# EAGLE board CT_schematic (EAGLE 7.6.0)

Size 100 x 80 mm. Coordinates in mm from the lower left corner, seen from the top.
Outline: 0,0 100,0 100,80 0,80 0,0
Copper layers (1*16): Top 0.035mm / dielectric 1.5mm / Bottom 0.035mm
Design rules "default": minimum track width 10mil, minimum drill 24mil, track to track 8mil, track to pad 8mil, pad to pad 8mil, via to via 8mil, smd to smd 8mil, copper to edge 40mil, drill to drill 8mil, minimum pad ring 10mil, minimum via ring 8mil, stop-mask expansion 4mil, vias tented up to drill 0mil, thermal gap 10mil

## Footprints (pad centres in the part's own frame; a part is rotated, then mirrored left to right if it is on the bottom)
C0402 = smd 0.5 x 0.5: 1 -0.508,0; 2 0.508,0
C0603 = smd 0.8 x 0.8: 1 -0.762,0; 2 0.762,0
C0805 = smd 1.2 x 1.3: 1 -1.016,0; 2 1.016,0
C1210 = smd 1.2 x 2.5: 1 -1.524,0; 2 1.524,0
C1206 = smd 1.3 x 1.6: 1 -1.524,0; 2 1.524,0
R0603 = smd 0.8 x 0.8: 1 -0.762,0; 2 0.762,0
2220 = smd 1.85 x 5.5: 1 -2.55,0; 2 2.55,0
EXV-9H = smd 3.505 x 1.676: 1 -2.857,0; 2 2.857,0
L1210 = smd 1.2 x 2.5: 1 -1.524,0; 2 1.524,0
IND25X25CZ = smd 2.489 x 3.429: 1 -2.718,0; 2 2.718,0
DR1040 = smd 1.6 x 3.2: 1 -4.458,0; 2 4.458,0
PJ-037B_PACKAGE = drill 3.7 square: 1 12,0 | drill 3.2 square: 2 6,0
R0402 = smd 0.5 x 0.5: 1 -0.508,0; 2 0.508,0
BGA624N80P25X25_210X210X20 = smd 0.5 x 0.5: A2 -8.8,9.6; A3 -8,9.6; A4 -7.2,9.6; A5 -6.4,9.6; A6 -5.6,9.6; A7 -4.8,9.6; A8 -4,9.6; A9 -3.2,9.6; A10 -2.4,9.6; A11 -1.6,9.6; A12 -0.8,9.6; A13 0,9.6; A14 0.8,9.6; A15 1.6,9.6; A16 2.4,9.6; A17 3.2,9.6; A18 4,9.6; A19 4.8,9.6; A20 5.6,9.6; A21 6.4,9.6; A22 7.2,9.6; A23 8,9.6; A24 8.8,9.6; A25 9.6,9.6; AA1 -9.6,-6.4; AA2 -8.8,-6.4; AA3 -8,-6.4; AA4 -7.2,-6.4; AA5 -6.4,-6.4; AA6 -5.6,-6.4; AA7 -4.8,-6.4; AA8 -4,-6.4; AA9 -3.2,-6.4; AA10 -2.4,-6.4; AA11 -1.6,-6.4; AA12 -0.8,-6.4; AA13 0,-6.4; AA14 0.8,-6.4; AA15 1.6,-6.4; AA16 2.4,-6.4; AA17 3.2,-6.4; AA18 4,-6.4; AA19 4.8,-6.4; AA20 5.6,-6.4; AA21 6.4,-6.4; AA22 7.2,-6.4; AA23 8,-6.4; AA24 8.8,-6.4; AA25 9.6,-6.4; AB1 -9.6,-7.2; AB2 -8.8,-7.2; AB3 -8,-7.2; AB4 -7.2,-7.2; AB5 -6.4,-7.2; AB6 -5.6,-7.2; AB7 -4.8,-7.2; AB8 -4,-7.2; AB9 -3.2,-7.2; AB10 -2.4,-7.2; AB11 -1.6,-7.2; AB12 -0.8,-7.2; AB13 0,-7.2; AB14 0.8,-7.2; AB15 1.6,-7.2; AB16 2.4,-7.2; AB17 3.2,-7.2; AB18 4,-7.2; AB19 4.8,-7.2; AB20 5.6,-7.2; AB21 6.4,-7.2; AB22 7.2,-7.2; AB23 8,-7.2; AB24 8.8,-7.2; AB25 9.6,-7.2; AC1 -9.6,-8; AC2 -8.8,-8; AC3 -8,-8; AC4 -7.2,-8; AC5 -6.4,-8; AC6 -5.6,-8; AC7 -4.8,-8; AC8 -4,-8; AC9 -3.2,-8; AC10 -2.4,-8; AC11 -1.6,-8; AC12 -0.8,-8; AC13 0,-8; AC14 0.8,-8; AC15 1.6,-8; AC16 2.4,-8; AC17 3.2,-8; AC18 4,-8; AC19 4.8,-8; AC20 5.6,-8; AC21 6.4,-8; AC22 7.2,-8; AC23 8,-8; AC24 8.8,-8; AC25 9.6,-8; AD1 -9.6,-8.8; AD2 -8.8,-8.8; AD3 -8,-8.8; AD4 -7.2,-8.8; AD5 -6.4,-8.8; AD6 -5.6,-8.8; AD7 -4.8,-8.8; AD8 -4,-8.8; AD9 -3.2,-8.8; AD10 -2.4,-8.8; AD11 -1.6,-8.8; AD12 -0.8,-8.8; AD13 0,-8.8; AD14 0.8,-8.8; AD15 1.6,-8.8; AD16 2.4,-8.8; AD17 3.2,-8.8; AD18 4,-8.8; AD19 4.8,-8.8; AD20 5.6,-8.8; AD21 6.4,-8.8; AD22 7.2,-8.8; AD23 8,-8.8; AD24 8.8,-8.8; AD25 9.6,-8.8; AE1 -9.6,-9.6; AE2 -8.8,-9.6; AE3 -8,-9.6; AE4 -7.2,-9.6; AE5 -6.4,-9.6; AE6 -5.6,-9.6; AE7 -4.8,-9.6; AE8 -4,-9.6; AE9 -3.2,-9.6; AE10 -2.4,-9.6; AE11 -1.6,-9.6; AE12 -0.8,-9.6; AE13 0,-9.6; AE14 0.8,-9.6; AE15 1.6,-9.6; AE16 2.4,-9.6; AE17 3.2,-9.6; AE18 4,-9.6; AE19 4.8,-9.6; AE20 5.6,-9.6; AE21 6.4,-9.6; AE22 7.2,-9.6; AE23 8,-9.6; AE24 8.8,-9.6; AE25 9.6,-9.6; B1 -9.6,8.8; B2 -8.8,8.8; B3 -8,8.8; B4 -7.2,8.8; B5 -6.4,8.8; B6 -5.6,8.8; B7 -4.8,8.8; B8 -4,8.8; B9 -3.2,8.8; B10 -2.4,8.8; B11 -1.6,8.8; B12 -0.8,8.8; B13 0,8.8; B14 0.8,8.8; B15 1.6,8.8; B16 2.4,8.8; B17 3.2,8.8; B18 4,8.8; B19 4.8,8.8; B20 5.6,8.8; B21 6.4,8.8; B22 7.2,8.8; B23 8,8.8; B24 8.8,8.8; B25 9.6,8.8; C1 -9.6,8; C2 -8.8,8; C3 -8,8; C4 -7.2,8; C5 -6.4,8; C6 -5.6,8; C7 -4.8,8; C8 -4,8; C9 -3.2,8; C10 -2.4,8; C11 -1.6,8; C12 -0.8,8; C13 0,8; C14 0.8,8; C15 1.6,8; C16 2.4,8; C17 3.2,8; C18 4,8; C19 4.8,8; C20 5.6,8; C21 6.4,8; C22 7.2,8; C23 8,8; C24 8.8,8; C25 9.6,8; D1 -9.6,7.2; D2 -8.8,7.2; D3 -8,7.2; D4 -7.2,7.2; D5 -6.4,7.2; D6 -5.6,7.2; D7 -4.8,7.2; D8 -4,7.2; D9 -3.2,7.2; D10 -2.4,7.2; D11 -1.6,7.2; D12 -0.8,7.2; D13 0,7.2; D14 0.8,7.2; D15 1.6,7.2; D16 2.4,7.2; D17 3.2,7.2; D18 4,7.2; D19 4.8,7.2; D20 5.6,7.2; D21 6.4,7.2; D22 7.2,7.2; D23 8,7.2; D24 8.8,7.2; D25 9.6,7.2; E1 -9.6,6.4; E2 -8.8,6.4; E3 -8,6.4; E4 -7.2,6.4; E5 -6.4,6.4; E6 -5.6,6.4; E7 -4.8,6.4; E8 -4,6.4; E9 -3.2,6.4; E10 -2.4,6.4; E11 -1.6,6.4; E12 -0.8,6.4; E13 0,6.4; E14 0.8,6.4; E15 1.6,6.4; E16 2.4,6.4; E17 3.2,6.4; E18 4,6.4; E19 4.8,6.4; E20 5.6,6.4; E21 6.4,6.4; E22 7.2,6.4; E23 8,6.4; E24 8.8,6.4; E25 9.6,6.4; F1 -9.6,5.6; F2 -8.8,5.6; F3 -8,5.6; F4 -7.2,5.6; F5 -6.4,5.6; F6 -5.6,5.6; F7 -4.8,5.6; F8 -4,5.6; F9 -3.2,5.6; F10 -2.4,5.6; F11 -1.6,5.6; F12 -0.8,5.6; F13 0,5.6; F14 0.8,5.6; F15 1.6,5.6; F16 2.4,5.6; F17 3.2,5.6; F18 4,5.6; F19 4.8,5.6; F20 5.6,5.6; F21 6.4,5.6; F22 7.2,5.6; F23 8,5.6; F24 8.8,5.6; F25 9.6,5.6; G1 -9.6,4.8; G2 -8.8,4.8; G3 -8,4.8; G4 -7.2,4.8; G5 -6.4,4.8; G6 -5.6,4.8; G7 -4.8,4.8; G8 -4,4.8; G9 -3.2,4.8; G10 -2.4,4.8; G11 -1.6,4.8; G12 -0.8,4.8; G13 0,4.8; G14 0.8,4.8; G15 1.6,4.8; G16 2.4,4.8; G17 3.2,4.8; G18 4,4.8; G19 4.8,4.8; G20 5.6,4.8; G21 6.4,4.8; G22 7.2,4.8; G23 8,4.8; G24 8.8,4.8; G25 9.6,4.8; H1 -9.6,4; H2 -8.8,4; H3 -8,4; H4 -7.2,4; H5 -6.4,4; H6 -5.6,4; H7 -4.8,4; H8 -4,4; H9 -3.2,4; H10 -2.4,4; H11 -1.6,4; H12 -0.8,4; H13 0,4; H14 0.8,4; H15 1.6,4; H16 2.4,4; H17 3.2,4; H18 4,4; H19 4.8,4; H20 5.6,4; H21 6.4,4; H22 7.2,4; H23 8,4; H24 8.8,4; H25 9.6,4; J1 -9.6,3.2; J2 -8.8,3.2; J3 -8,3.2; J4 -7.2,3.2; J5 -6.4,3.2; J6 -5.6,3.2; J7 -4.8,3.2; J8 -4,3.2; J9 -3.2,3.2; J10 -2.4,3.2; J11 -1.6,3.2; J12 -0.8,3.2; J13 0,3.2; J14 0.8,3.2; J15 1.6,3.2; J16 2.4,3.2; J17 3.2,3.2; J18 4,3.2; J19 4.8,3.2; J20 5.6,3.2; J21 6.4,3.2; J22 7.2,3.2; J23 8,3.2; J24 8.8,3.2; J25 9.6,3.2; K1 -9.6,2.4; K2 -8.8,2.4; K3 -8,2.4; K4 -7.2,2.4; K5 -6.4,2.4; K6 -5.6,2.4; K7 -4.8,2.4; K8 -4,2.4; K9 -3.2,2.4; K10 -2.4,2.4; K11 -1.6,2.4; K12 -0.8,2.4; K13 0,2.4; K14 0.8,2.4; K15 1.6,2.4; K16 2.4,2.4; K17 3.2,2.4; K18 4,2.4; K19 4.8,2.4; K20 5.6,2.4; K21 6.4,2.4; K22 7.2,2.4; K23 8,2.4; K24 8.8,2.4; K25 9.6,2.4; L1 -9.6,1.6; L2 -8.8,1.6; L3 -8,1.6; L4 -7.2,1.6; L5 -6.4,1.6; L6 -5.6,1.6; L7 -4.8,1.6; L8 -4,1.6; L9 -3.2,1.6; L10 -2.4,1.6; L11 -1.6,1.6; L12 -0.8,1.6; L13 0,1.6; L14 0.8,1.6; L15 1.6,1.6; L16 2.4,1.6; L17 3.2,1.6; L18 4,1.6; L19 4.8,1.6; L20 5.6,1.6; L21 6.4,1.6; L22 7.2,1.6; L23 8,1.6; L24 8.8,1.6; L25 9.6,1.6; M1 -9.6,0.8; M2 -8.8,0.8; M3 -8,0.8; M4 -7.2,0.8; M5 -6.4,0.8; M6 -5.6,0.8; M7 -4.8,0.8; M8 -4,0.8; M9 -3.2,0.8; M10 -2.4,0.8; M11 -1.6,0.8; M12 -0.8,0.8; M13 0,0.8; M14 0.8,0.8; M15 1.6,0.8; M16 2.4,0.8; M17 3.2,0.8; M18 4,0.8; M19 4.8,0.8; M20 5.6,0.8; M21 6.4,0.8; M22 7.2,0.8; M23 8,0.8; M24 8.8,0.8; M25 9.6,0.8; N1 -9.6,0; N2 -8.8,0; N3 -8,0; N4 -7.2,0; N5 -6.4,0; N6 -5.6,0; N7 -4.8,0; N8 -4,0; N9 -3.2,0; N10 -2.4,0; N11 -1.6,0; N12 -0.8,0; N13 0,0; N14 0.8,0; N15 1.6,0; N16 2.4,0; N17 3.2,0; N18 4,0; N19 4.8,0; N20 5.6,0; N21 6.4,0; N22 7.2,0; N23 8,0; N24 8.8,0; N25 9.6,0; P1 -9.6,-0.8; P2 -8.8,-0.8; P3 -8,-0.8; P4 -7.2,-0.8; P5 -6.4,-0.8; P6 -5.6,-0.8; P7 -4.8,-0.8; P8 -4,-0.8; P9 -3.2,-0.8; P10 -2.4,-0.8; P11 -1.6,-0.8; P12 -0.8,-0.8; P13 0,-0.8; P14 0.8,-0.8; P15 1.6,-0.8; P16 2.4,-0.8; P17 3.2,-0.8; P18 4,-0.8; P19 4.8,-0.8; P20 5.6,-0.8; P21 6.4,-0.8; P22 7.2,-0.8; P23 8,-0.8; P24 8.8,-0.8; P25 9.6,-0.8; R1 -9.6,-1.6; R2 -8.8,-1.6; R3 -8,-1.6; R4 -7.2,-1.6; R5 -6.4,-1.6; R6 -5.6,-1.6; R7 -4.8,-1.6; R8 -4,-1.6; R9 -3.2,-1.6; R10 -2.4,-1.6; R11 -1.6,-1.6; R12 -0.8,-1.6; R13 0,-1.6; R14 0.8,-1.6; R15 1.6,-1.6; R16 2.4,-1.6; R17 3.2,-1.6; R18 4,-1.6; R19 4.8,-1.6; R20 5.6,-1.6; R21 6.4,-1.6; R22 7.2,-1.6; R23 8,-1.6; R24 8.8,-1.6; R25 9.6,-1.6; T1 -9.6,-2.4; T2 -8.8,-2.4; T3 -8,-2.4; T4 -7.2,-2.4; T5 -6.4,-2.4; T6 -5.6,-2.4; T7 -4.8,-2.4; T8 -4,-2.4; T9 -3.2,-2.4; T10 -2.4,-2.4; T11 -1.6,-2.4; T12 -0.8,-2.4; T13 0,-2.4; T14 0.8,-2.4; T15 1.6,-2.4; T16 2.4,-2.4; T17 3.2,-2.4; T18 4,-2.4; T19 4.8,-2.4; T20 5.6,-2.4; T21 6.4,-2.4; T22 7.2,-2.4; T23 8,-2.4; T24 8.8,-2.4; T25 9.6,-2.4; U1 -9.6,-3.2; U2 -8.8,-3.2; U3 -8,-3.2; U4 -7.2,-3.2; U5 -6.4,-3.2; U6 -5.6,-3.2; U7 -4.8,-3.2; U8 -4,-3.2; U9 -3.2,-3.2; U10 -2.4,-3.2; U11 -1.6,-3.2; U12 -0.8,-3.2; U13 0,-3.2; U14 0.8,-3.2; U15 1.6,-3.2; U16 2.4,-3.2; U17 3.2,-3.2; U18 4,-3.2; U19 4.8,-3.2; U20 5.6,-3.2; U21 6.4,-3.2; U22 7.2,-3.2; U23 8,-3.2; U24 8.8,-3.2; U25 9.6,-3.2; V1 -9.6,-4; V2 -8.8,-4; V3 -8,-4; V4 -7.2,-4; V5 -6.4,-4; V6 -5.6,-4; V7 -4.8,-4; V8 -4,-4; V9 -3.2,-4; V10 -2.4,-4; V11 -1.6,-4; V12 -0.8,-4; V13 0,-4; V14 0.8,-4; V15 1.6,-4; V16 2.4,-4; V17 3.2,-4; V18 4,-4; V19 4.8,-4; V20 5.6,-4; V21 6.4,-4; V22 7.2,-4; V23 8,-4; V24 8.8,-4; V25 9.6,-4; W1 -9.6,-4.8; W2 -8.8,-4.8; W3 -8,-4.8; W4 -7.2,-4.8; W5 -6.4,-4.8; W6 -5.6,-4.8; W7 -4.8,-4.8; W8 -4,-4.8; W9 -3.2,-4.8; W10 -2.4,-4.8; W11 -1.6,-4.8; W12 -0.8,-4.8; W13 0,-4.8; W14 0.8,-4.8; W15 1.6,-4.8; W16 2.4,-4.8; W17 3.2,-4.8; W18 4,-4.8; W19 4.8,-4.8; W20 5.6,-4.8; W21 6.4,-4.8; W22 7.2,-4.8; W23 8,-4.8; W24 8.8,-4.8; W25 9.6,-4.8; Y1 -9.6,-5.6; Y2 -8.8,-5.6; Y3 -8,-5.6; Y4 -7.2,-5.6; Y5 -6.4,-5.6; Y6 -5.6,-5.6; Y7 -4.8,-5.6; Y8 -4,-5.6; Y9 -3.2,-5.6; Y10 -2.4,-5.6; Y11 -1.6,-5.6; Y12 -0.8,-5.6; Y13 0,-5.6; Y14 0.8,-5.6; Y15 1.6,-5.6; Y16 2.4,-5.6; Y17 3.2,-5.6; Y18 4,-5.6; Y19 4.8,-5.6; Y20 5.6,-5.6; Y21 6.4,-5.6; Y22 7.2,-5.6; Y23 8,-5.6; Y24 8.8,-5.6; Y25 9.6,-5.6
NC7SZ125M5X = smd 1.3 x 0.7: 1 -1.3,0.95; 2 -1.3,0; 3 -1.3,-0.95; 4 1.3,-0.95; 5 1.3,0.95
ARDUCAM = drill 1 pad 1.8 square: 1 0,0 | drill 1 pad 1.8: 2 0,2.54; 3 2.54,0; 4 2.54,2.54; 5 5.08,0; 6 5.08,2.54; 7 7.62,0; 8 7.62,2.54; 9 10.16,0; 10 10.16,2.54; 11 12.7,0; 12 12.7,2.54; 13 15.24,0; 14 15.24,2.54; 15 17.78,0; 16 17.78,2.54; 17 20.32,0; 18 20.32,2.54; 19 22.86,0; 20 22.86,2.54
10100565 = smd 0.8 x 2.35: 1 0,0; 2 1.25,0; 3 2.55,0; 4 4.25,0; 5 5.43,0; 6 6.68,0; 7 7.93,0; 8 9.18,0; 9 11.67,0; 10 14.18,0; 11 15.43,0; 12 16.68,0; 13 17.93,0; 14 19.18,0; 15 21.68,0 | smd 1.5 x 3.1: 16 23.495,-1.375; 20 25.685,-22.875 | smd 1.55 x 3.1: 17 -1.815,-1.375; 21 -1.815,-22.875 | drill 1.1 pad 1.1: 18 21.68,-2.375; 19 0.68,-2.375
ER-TFT018-2 = smd 0.35 x 4: 1 0,0; 2 0.5,0; 3 1,0; 4 1.5,0; 5 2,0; 6 2.5,0; 7 3,0; 8 3.5,0; 9 4,0; 10 4.5,0; 11 5,0; 12 5.5,0; 13 6,0; 14 6.5,0; 15 7,0; 16 7.5,0; 17 8,0; 18 8.5,0; 19 9,0; 20 9.5,0; 21 10,0; 22 10.5,0; 23 11,0; 24 11.5,0; 25 12,0; 26 12.5,0; 27 13,0; 28 13.5,0; 29 14,0; 30 14.5,0; 31 15,0; 32 15.5,0; 33 16,0; 34 16.5,0; 35 17,0; 36 17.5,0; 37 18,0; 38 18.5,0; 39 19,0; 40 19.5,0
LH430WV2-SD01 = smd 0.23 x 0.7: 1 0,0; 2 -0.4,0; 3 -0.8,0; 4 -1.2,0; 5 -1.6,0; 6 -2,0; 7 -2.4,0; 8 -2.8,0; 9 -3.2,0; 10 -3.6,0; 11 -4,0; 12 -4.4,0; 13 -4.8,0; 14 -5.2,0; 15 -5.6,0; 16 -5.6,-2.15; 17 -5.2,-2.15; 18 -4.8,-2.15; 19 -4.4,-2.15; 20 -4,-2.15; 21 -3.6,-2.15; 22 -3.2,-2.15; 23 -2.8,-2.15; 24 -2.4,-2.15; 25 -2,-2.15; 26 -1.6,-2.15; 27 -1.2,-2.15; 28 -0.8,-2.15; 29 -0.4,-2.15; 30 0,-2.15
LBGA-64 = smd 0.559 x 0.559: A1 -3.5,3.5; A2 -2.5,3.5; A3 -1.5,3.5; A4 -0.5,3.5; A5 0.5,3.5; A6 1.5,3.5; A7 2.5,3.5; A8 3.5,3.5; B1 -3.5,2.5; B2 -2.5,2.5; B3 -1.5,2.5; B4 -0.5,2.5; B5 0.5,2.5; B6 1.5,2.5; B7 2.5,2.5; B8 3.5,2.5; C1 -3.5,1.5; C2 -2.5,1.5; C3 -1.5,1.5; C4 -0.5,1.5; C5 0.5,1.5; C6 1.5,1.5; C7 2.5,1.5; C8 3.5,1.5; D1 -3.5,0.5; D2 -2.5,0.5; D3 -1.5,0.5; D4 -0.5,0.5; D5 0.5,0.5; D6 1.5,0.5; D7 2.5,0.5; D8 3.5,0.5; E1 -3.5,-0.5; E2 -2.5,-0.5; E3 -1.5,-0.5; E4 -0.5,-0.5; E5 0.5,-0.5; E6 1.5,-0.5; E7 2.5,-0.5; E8 3.5,-0.5; F1 -3.5,-1.5; F2 -2.5,-1.5; F3 -1.5,-1.5; F4 -0.5,-1.5; F5 0.5,-1.5; F6 1.5,-1.5; F7 2.5,-1.5; F8 3.5,-1.5; G1 -3.5,-2.5; G2 -2.5,-2.5; G3 -1.5,-2.5; G4 -0.5,-2.5; G5 0.5,-2.5; G6 1.5,-2.5; G7 2.5,-2.5; G8 3.5,-2.5; H1 -3.5,-3.5; H2 -2.5,-3.5; H3 -1.5,-3.5; H4 -0.5,-3.5; H5 0.5,-3.5; H6 1.5,-3.5; H7 2.5,-3.5; H8 3.5,-3.5
QFN-28 = smd 0.813 x 0.305: 1 -2.451,1.5; 2 -2.451,1; 3 -2.451,0.5; 4 -2.451,0; 5 -2.451,-0.5; 6 -2.451,-1; 7 -2.451,-1.5; 15 2.451,-1.5; 16 2.451,-1; 17 2.451,-0.5; 18 2.451,0; 19 2.451,0.5; 20 2.451,1; 21 2.451,1.5 | smd 0.305 x 0.813: 8 -1.5,-2.451; 9 -1,-2.451; 10 -0.5,-2.451; 11 0,-2.451; 12 0.5,-2.451; 13 1,-2.451; 14 1.5,-2.451; 22 1.5,2.451; 23 1,2.451; 24 0.5,2.451; 25 0,2.451; 26 -0.5,2.451; 27 -1,2.451; 28 -1.5,2.451 | smd 3.607 x 3.607: 29 0,0
SJ-43515TS-SMT-TR = smd 2.2 x 3: 1 0.6,-7.4; 4 3.4,-7.4 | smd 3 x 3: 2 12.8,-7.4; 5 17,-3 | smd 2 x 3: 3 5.3,0; 6 2.5,0 | drill 1.8: P$7 4.5,-3.69; P$8 11.54,-3.69
ABLS-24.000MHZ-B4-T = smd 5.6 x 2.8: 1 -3.81,0; 2 5.69,0
ABS07-32.768KHZ-7-T = smd 1.1 x 2.4: 1 -2.5,0; 2 0,0
ABLS-12.288MHZ-B4-T = smd 5.6 x 2.8: 1 -3.81,0; 2 5.69,0
ASFL1 = smd 1.7 x 1.5: 1 -1.27,-1.1; 2 1.27,-1.1; 3 1.27,1.1; 4 -1.27,1.1
SHPCIE100 = smd 1.8 x 2.3: 1 0,0; 2 2.54,0; 3 5.08,0; 4 5.08,4.2; 5 2.54,4.2; 6 0,4.2
SOIC-8_EP = smd 1.6 x 0.533: 1 -2.921,1.905; 2 -2.921,0.635; 3 -2.921,-0.635; 4 -2.921,-1.905; 5 2.921,-1.905; 6 2.921,-0.635; 7 2.921,0.635; 8 2.921,1.905 | smd 2.54 x 3.302: EPAD 0,0 | drill 0.406 pad 0.406: P$1 -0.508,0.635; P$2 0.381,0.635; P$3 -0.508,-0.635; P$4 0.381,-0.635
WSON-8 = smd 0.3 x 0.6: 1 -0.75,0; 2 0.05,0; 3 0.85,0; 4 1.65,0; 5 1.65,3.8; 6 0.85,3.8; 7 0.05,3.8; 8 -0.75,3.8 | smd 3 x 2.6: PAD 0.45,1.9
DFN-8_DDB = smd 0.805 x 0.3: 1 -0.952,0.75; 2 -0.952,0.25; 3 -0.952,-0.25; 4 -0.952,-0.75; 5 0.952,-0.75; 6 0.952,-0.25; 7 0.952,0.25; 8 0.952,0.75 | smd 0.61 x 2.2: 9 0,0
IR3899MTR1PBF = smd 0.25 x 0.75: 1 0,0; 2 0.5,0; 3 1,0; 4 1.5,0; 5 2,0; 6 2.5,0; 7 3,0 | smd 0.75 x 0.25: 8 3.425,0.78; 9 3.425,1.28; 10 3.425,1.78; 14 -0.425,1.78; 15 -0.425,1.28; 16 -0.425,0.78 | smd 0.3 x 1.95: 11 3.22,3.63 | smd 1.62 x 2.42: 12 1.786,3.8 | smd 1 x 1.95: 13 0.117,3.63 | smd 2.19 x 1.25: 17 1.51,1.26
QFN-16_EP = smd 0.805 x 0.3: 1 -1.452,0.75; 2 -1.452,0.25; 3 -1.452,-0.25; 4 -1.452,-0.75; 9 1.452,-0.75; 10 1.452,-0.25; 11 1.452,0.25; 12 1.452,0.75 | smd 0.3 x 0.805: 5 -0.75,-1.452; 6 -0.25,-1.452; 7 0.25,-1.452; 8 0.75,-1.452; 13 0.75,1.452; 14 0.25,1.452; 15 -0.25,1.452; 16 -0.75,1.452 | smd 1.55 x 1.55: 17 0,0
QFN-38_UHF = smd 0.75 x 0.3: 1 -2.4,2.75; 2 -2.4,2.25; 3 -2.4,1.75; 4 -2.4,1.25; 6 -2.4,0.25; 7 -2.4,-0.25; 8 -2.4,-0.75; 9 -2.4,-1.25; 10 -2.4,-1.75; 11 -2.4,-2.25; 12 -2.4,-2.75; 20 2.4,-2.75; 21 2.4,-2.25; 22 2.4,-1.75; 23 2.4,-1.25; 24 2.4,-0.75; 25 2.4,-0.25; 26 2.4,0.25; 27 2.4,0.75; 28 2.4,1.25; 29 2.4,1.75; 30 2.4,2.25; 31 2.4,2.75 | smd 0.758 x 0.3: 5 -2.4,0.75 | smd 0.3 x 0.75: 13 -1.5,-3.4; 14 -1,-3.4; 15 -0.5,-3.4; 16 0,-3.4; 17 0.5,-3.4; 18 1,-3.4; 19 1.5,-3.4; 32 1.5,3.4; 33 1,3.4; 34 0.5,3.4; 35 0,3.4; 36 -0.5,3.4; 37 -1,3.4; 38 -1.5,3.4 | smd 3.2 x 5.2: 39 0,0
IRF8306MTRPBF = smd 0.9 x 1.85: 1 0,0; 2 0,-2.35; 6 6.4,0; 7 6.4,-2.35 | smd 0.75 x 0.75: 3 1.75,-1.175 | smd 1.45 x 0.87: 4 3.5,-0.565; 5 3.5,-1.785
SW_4-1437565-2 = smd 1.4 x 2.1: 1 -2.23,4.55; 2 -2.23,-4.55; 3 2.23,4.55; 4 2.23,-4.55
LGM67K-G1J2-24-Z = smd 0.8 x 1.4: A -2,0; C 0,0

## Placement (x,y rotation side)
C1  1.2e-11  [C0402]  -100.33,166.37 0 top  (outside the outline)
C2  1.2e-11  [C0402]  -104.14,166.37 0 top  (outside the outline)
C3  1.2e-11  [C0402]  -107.95,166.37 0 top  (outside the outline)
C4  1.2e-11  [C0402]  -111.76,166.37 0 top  (outside the outline)
C5  2.2e-07  [C0603]  -110.49,146.05 0 top  (outside the outline)
C6  1e-05  [C0805]  -34.29,130.81 0 top  (outside the outline)
C7  2.2e-07  [C0603]  -114.3,146.05 0 top  (outside the outline)
C8  2.2e-07  [C0603]  -118.11,146.05 0 top  (outside the outline)
C9  2.2e-07  [C0603]  -121.92,146.05 0 top  (outside the outline)
C10  2.2e-07  [C0603]  -125.73,146.05 0 top  (outside the outline)
C11  2.2e-07  [C0603]  -129.54,146.05 0 top  (outside the outline)
C12  2.2e-07  [C0603]  -133.35,146.05 0 top  (outside the outline)
C13  2.2e-07  [C0603]  -15.24,151.13 0 top  (outside the outline)
C14  2.2e-05  [C1210]  -38.1,118.11 0 top  (outside the outline)
C15  2.2e-07  [C0603]  -19.05,151.13 0 top  (outside the outline)
C16  2.2e-07  [C0603]  -22.86,151.13 0 top  (outside the outline)
C17  2.2e-07  [C0603]  -26.67,151.13 0 top  (outside the outline)
C18  1e-05  [C0805]  -39.37,130.81 0 top  (outside the outline)
C19  2.2e-07  [C0603]  -30.48,151.13 0 top  (outside the outline)
C20  2.2e-05  [C1210]  -44.45,118.11 0 top  (outside the outline)
C21  2.2e-07  [C0603]  -34.29,151.13 0 top  (outside the outline)
C22  2.2e-07  [C0603]  -38.1,151.13 0 top  (outside the outline)
C23  2.2e-07  [C0603]  -41.91,151.13 0 top  (outside the outline)
C24  2.2e-07  [C0603]  -45.72,151.13 0 top  (outside the outline)
C25  1e-05  [C0805]  -44.45,130.81 0 top  (outside the outline)
C26  1e-05  [C0805]  -49.53,130.81 0 top  (outside the outline)
C27  2.2e-07  [C0603]  -49.53,151.13 0 top  (outside the outline)
C28  2.2e-07  [C0603]  -53.34,151.13 0 top  (outside the outline)
C29  2.2e-07  [C0603]  -57.15,151.13 0 top  (outside the outline)
C30  1e-05  [C0805]  -54.61,130.81 0 top  (outside the outline)
C31  2.2e-07  [C0603]  -60.96,151.13 0 top  (outside the outline)
C32  1e-05  [C0805]  -59.69,130.81 0 top  (outside the outline)
C33  1e-05  [C0805]  -64.77,130.81 0 top  (outside the outline)
C34  1e-05  [C0805]  -69.85,130.81 0 top  (outside the outline)
C35  2.2e-07  [C0603]  -64.77,151.13 0 top  (outside the outline)
C36  1e-05  [C0805]  -74.93,130.81 0 top  (outside the outline)
C37  2.2e-07  [C0603]  -68.58,151.13 0 top  (outside the outline)
C38  4.7e-06  [C0805]  -80.01,130.81 0 top  (outside the outline)
C39  2.2e-07  [C0603]  -72.39,151.13 0 top  (outside the outline)
C40  4.7e-06  [C0805]  -85.09,130.81 0 top  (outside the outline)
C41  2.2e-07  [C0603]  -76.2,151.13 0 top  (outside the outline)
C42  4.7e-06  [C0805]  -90.17,130.81 0 top  (outside the outline)
C43  2.2e-07  [C0603]  -80.01,151.13 0 top  (outside the outline)
C44  4.7e-06  [C0805]  -95.25,130.81 0 top  (outside the outline)
C45  2.2e-07  [C0603]  -83.82,151.13 0 top  (outside the outline)
C46  4.7e-06  [C0805]  -100.33,130.81 0 top  (outside the outline)
C47  2.2e-07  [C0603]  -87.63,151.13 0 top  (outside the outline)
C48  4.7e-06  [C0805]  -105.41,130.81 0 top  (outside the outline)
C49  2.2e-07  [C0603]  -91.44,151.13 0 top  (outside the outline)
C50  4.7e-06  [C0805]  -110.49,130.81 0 top  (outside the outline)
C51  2.2e-07  [C0603]  -95.25,151.13 0 top  (outside the outline)
C52  4.7e-06  [C0805]  -115.57,130.81 0 top  (outside the outline)
C53  2.2e-07  [C0603]  -99.06,151.13 0 top  (outside the outline)
C54  1e-05  [C0805]  -120.65,130.81 0 top  (outside the outline)
C55  1e-07  [C0402]  -133.35,171.45 0 top  (outside the outline)
C56  2.2e-07  [C0603]  -102.87,151.13 0 top  (outside the outline)
C57  2.2e-07  [C0603]  -106.68,151.13 0 top  (outside the outline)
C58  2.2e-07  [C0603]  -110.49,151.13 0 top  (outside the outline)
C59  2.2e-07  [C0603]  -114.3,151.13 0 top  (outside the outline)
C60  2.2e-07  [C0603]  -118.11,151.13 0 top  (outside the outline)
C61  2.2e-07  [C0603]  -121.92,151.13 0 top  (outside the outline)
C62  2.2e-07  [C0603]  -125.73,151.13 0 top  (outside the outline)
C63  2.2e-07  [C0603]  -129.54,151.13 0 top  (outside the outline)
C64  1e-05  [C0805]  -125.73,130.81 0 top  (outside the outline)
C65  2.2e-07  [C0603]  -133.35,151.13 0 top  (outside the outline)
C66  2.2e-07  [C0603]  -15.24,156.21 0 top  (outside the outline)
C67  2.2e-07  [C0603]  -19.05,156.21 0 top  (outside the outline)
C68  2.2e-07  [C0603]  -22.86,156.21 0 top  (outside the outline)
C69  2.2e-07  [C0603]  -26.67,156.21 0 top  (outside the outline)
C70  2.2e-07  [C0603]  -30.48,156.21 0 top  (outside the outline)
C71  2.2e-05  [C1210]  -50.8,118.11 0 top  (outside the outline)
C72  2.2e-07  [C0603]  -34.29,156.21 0 top  (outside the outline)
C73  2.2e-07  [C0603]  -38.1,156.21 0 top  (outside the outline)
C74  2.2e-07  [C0603]  -41.91,156.21 0 top  (outside the outline)
C75  2.2e-07  [C0603]  -45.72,156.21 0 top  (outside the outline)
C76  2.2e-07  [C0603]  -49.53,156.21 0 top  (outside the outline)
C77  2.2e-07  [C0603]  -53.34,156.21 0 top  (outside the outline)
C78  2.2e-05  [C1210]  -57.15,118.11 0 top  (outside the outline)
C79  2.2e-07  [C0603]  -57.15,156.21 0 top  (outside the outline)
C80  2.2e-07  [C0603]  -60.96,156.21 0 top  (outside the outline)
C81  2.2e-07  [C0603]  -64.77,156.21 0 top  (outside the outline)
C82  2.2e-07  [C0603]  -68.58,156.21 0 top  (outside the outline)
C83  2.2e-07  [C0603]  -72.39,156.21 0 top  (outside the outline)
C84  2.2e-07  [C0603]  -76.2,156.21 0 top  (outside the outline)
C85  2.2e-07  [C0603]  -80.01,156.21 0 top  (outside the outline)
C86  2.2e-07  [C0603]  -83.82,156.21 0 top  (outside the outline)
C87  2.2e-05  [C1210]  -63.5,118.11 0 top  (outside the outline)
C88  2.2e-07  [C0603]  -87.63,156.21 0 top  (outside the outline)
C89  2.2e-07  [C0603]  -91.44,156.21 0 top  (outside the outline)
C90  2.2e-05  [C1210]  -69.85,118.11 0 top  (outside the outline)
C91  2.2e-05  [C1210]  -76.2,118.11 0 top  (outside the outline)
C92  2.2e-05  [C1210]  -82.55,118.11 0 top  (outside the outline)
C93  2.2e-07  [C0603]  -95.25,156.21 0 top  (outside the outline)
C94  2.2e-07  [C0603]  -99.06,156.21 0 top  (outside the outline)
C95  2.2e-07  [C0603]  -102.87,156.21 0 top  (outside the outline)
C96  2.2e-07  [C0603]  -106.68,156.21 0 top  (outside the outline)
C97  2.2e-07  [C0603]  -110.49,156.21 0 top  (outside the outline)
C98  2.2e-07  [C0603]  -114.3,156.21 0 top  (outside the outline)
C99  2.2e-07  [C0603]  -118.11,156.21 0 top  (outside the outline)
C100  2.2e-05  [C1210]  -88.9,118.11 0 top  (outside the outline)
C101  2.2e-07  [C0603]  -121.92,156.21 0 top  (outside the outline)
C102  2.2e-05  [C1210]  -95.25,118.11 0 top  (outside the outline)
C103  2.2e-05  [C1210]  -101.6,118.11 0 top  (outside the outline)
C104  1e-06  [C0603]  -19.05,161.29 0 top  (outside the outline)
C105  1e-07  [C0402]  -123.19,166.37 0 top  (outside the outline)
C106  1e-05  [C0805]  -130.81,130.81 0 top  (outside the outline)
C107  1e-07  [C0402]  -127,166.37 0 top  (outside the outline)
C108  1e-07  [C0402]  -130.81,166.37 0 top  (outside the outline)
C109  1e-07  [C0402]  -134.62,166.37 0 top  (outside the outline)
C110  1e-07  [C0402]  -15.24,171.45 0 top  (outside the outline)
C111  1e-07  [C0402]  -19.05,171.45 0 top  (outside the outline)
C112  1e-07  [C0402]  -22.86,171.45 0 top  (outside the outline)
C113  1e-07  [C0402]  -26.67,171.45 0 top  (outside the outline)
C114  1e-07  [C0402]  -30.48,171.45 0 top  (outside the outline)
C115  1e-08  [C0402]  -34.29,171.45 0 top  (outside the outline)
C116  1e-08  [C0402]  -38.1,171.45 0 top  (outside the outline)
C117  2.2e-05  [C1210]  -107.95,118.11 0 top  (outside the outline)
C118  2.2e-05  [C1210]  -114.3,118.11 0 top  (outside the outline)
C119  1e-09  [C0402]  -41.91,171.45 0 top  (outside the outline)
C120  1e-09  [C0402]  -45.72,171.45 0 top  (outside the outline)
C121  1e-07  [C0402]  -49.53,171.45 0 top  (outside the outline)
C122  1e-07  [C0402]  -53.34,171.45 0 top  (outside the outline)
C123  1e-07  [C0402]  -57.15,171.45 0 top  (outside the outline)
C124  1e-07  [C0402]  -60.96,171.45 0 top  (outside the outline)
C125  1e-07  [C0402]  -64.77,171.45 0 top  (outside the outline)
C126  1e-05  [C0805]  -15.24,135.89 0 top  (outside the outline)
C127  1e-05  [C0805]  -20.32,135.89 0 top  (outside the outline)
C128  1e-05  [C0805]  -25.4,135.89 0 top  (outside the outline)
C129  1e-05  [C0805]  -30.48,135.89 0 top  (outside the outline)
C130  1e-05  [C0805]  -35.56,135.89 0 top  (outside the outline)
C131  2.2e-11  [C0402]  -115.57,166.37 0 top  (outside the outline)
C132  2.2e-11  [C0402]  -119.38,166.37 0 top  (outside the outline)
C133  1e-08  [C0402]  -68.58,171.45 0 top  (outside the outline)
C134  1e-08  [C0402]  -72.39,171.45 0 top  (outside the outline)
C135  1e-08  [C0402]  -76.2,171.45 0 top  (outside the outline)
C136  1e-05  [C1210]  -120.65,118.11 0 top  (outside the outline)
C137  1e-05  [C1210]  -127,118.11 0 top  (outside the outline)
C138  1e-05  [C1210]  -133.35,118.11 0 top  (outside the outline)
C139  1e-05  [C1210]  -16.51,124.46 0 top  (outside the outline)
C140  1e-08  [C0402]  -80.01,171.45 0 top  (outside the outline)
C141  1e-05  [C1206]  -80.01,124.46 0 top  (outside the outline)
C142  1e-05  [C1210]  -22.86,124.46 0 top  (outside the outline)
C143  1e-08  [C0402]  -83.82,171.45 0 top  (outside the outline)
C144  1e-05  [C1206]  -86.36,124.46 0 top  (outside the outline)
C145  1e-05  [C1210]  -29.21,124.46 0 top  (outside the outline)
C146  1e-05  [C1210]  -35.56,124.46 0 top  (outside the outline)
C147  2.2e-06  [C0603]  -125.73,156.21 0 top  (outside the outline)
C148  2.2e-07  [C0603]  -129.54,156.21 0 top  (outside the outline)
C149  0.0001  [C1210]  -41.91,124.46 0 top  (outside the outline)
C150  2.2e-06  [C0603]  -133.35,156.21 0 top  (outside the outline)
C151  1e-07  [C0402]  -87.63,171.45 0 top  (outside the outline)
C152  1e-07  [C0402]  -91.44,171.45 0 top  (outside the outline)
C153  1.0231891044381e-09  [R0603]  -55.88,135.89 0 top  (outside the outline)
C154  3.4881446742207e-08  [R0603]  -66.04,135.89 0 top  (outside the outline)
C157  1e-05  [C1210]  -48.26,124.46 0 top  (outside the outline)
C158  1e-05  [C1210]  -54.61,124.46 0 top  (outside the outline)
C159  1e-05  [C1210]  -60.96,124.46 0 top  (outside the outline)
C160  1e-05  [C1210]  -67.31,124.46 0 top  (outside the outline)
C161  1e-08  [C0402]  -95.25,171.45 0 top  (outside the outline)
C162  1e-05  [C1206]  -92.71,124.46 0 top  (outside the outline)
C163  1e-05  [C0805]  -40.64,135.89 0 top  (outside the outline)
C164  1e-05  [C0805]  -45.72,135.89 0 top  (outside the outline)
C165  1e-06  [C0603]  -22.86,161.29 0 top  (outside the outline)
C166  1e-07  [C0402]  -99.06,171.45 0 top  (outside the outline)
C167  6.8e-05  [2220]  -92.71,90.17 0 top  (outside the outline)
C168  1e-07  [C0402]  -102.87,171.45 0 top  (outside the outline)
C169  2.2e-06  [C0603]  -15.24,161.29 0 top  (outside the outline)
C170  2.45e-08  [R0603]  -71.12,140.97 0 top  (outside the outline)
C171  2.8258362168397e-09  [R0603]  -76.2,135.89 0 top  (outside the outline)
C172  7.105e-09  [R0603]  -109.22,135.89 0 top  (outside the outline)
C173  0.0001  [EXV-9H]  -101.6,100.33 0 top  (outside the outline)
C174  0.0001  [EXV-9H]  -113.03,100.33 0 top  (outside the outline)
C175  1e-08  [C0402]  -106.68,171.45 0 top  (outside the outline)
C176  1e-08  [C0402]  -110.49,171.45 0 top  (outside the outline)
C177  1e-08  [C0402]  -114.3,171.45 0 top  (outside the outline)
C178  1e-08  [C0402]  -118.11,171.45 0 top  (outside the outline)
C179  1e-08  [C0402]  -121.92,171.45 0 top  (outside the outline)
C180  1e-08  [C0402]  -125.73,171.45 0 top  (outside the outline)
C181  1e-08  [C0402]  -129.54,171.45 0 top  (outside the outline)
I1  1e-05  [L1210]  -73.66,124.46 0 top  (outside the outline)
I2  6.8e-07  [IND25X25CZ]  -57.15,110.49 0 top  (outside the outline)
I3  2.5e-06  [DR1040]  -121.92,77.47 0 top  (outside the outline)
J1  PJ-037B  [PJ-037B_PACKAGE]  -83.82,78.74 0 top  (outside the outline)
R1  4700.0  [R0603]  -26.67,161.29 0 top  (outside the outline)
R3  1000.0  [R0603]  -30.48,161.29 0 top  (outside the outline)
R5  4700.0  [R0603]  -34.29,161.29 0 top  (outside the outline)
R6  4700.0  [R0603]  -38.1,161.29 0 top  (outside the outline)
R7  4700.0  [R0603]  -41.91,161.29 0 top  (outside the outline)
R8  4700.0  [R0603]  -45.72,161.29 0 top  (outside the outline)
R9  4700.0  [R0603]  -49.53,161.29 0 top  (outside the outline)
R10  4700.0  [R0603]  -53.34,161.29 0 top  (outside the outline)
R11  4700.0  [R0603]  -57.15,161.29 0 top  (outside the outline)
R12  4700.0  [R0603]  -60.96,161.29 0 top  (outside the outline)
R13  2200.0  [R0603]  -64.77,161.29 0 top  (outside the outline)
R14  4700.0  [R0603]  -68.58,161.29 0 top  (outside the outline)
R15  4700.0  [R0603]  -72.39,161.29 0 top  (outside the outline)
R16  6040.0  [R0603]  -76.2,161.29 0 top  (outside the outline)
R17  6040.0  [R0603]  -80.01,161.29 0 top  (outside the outline)
R18  1600.0  [R0603]  -83.82,161.29 0 top  (outside the outline)
R19  200.0  [R0603]  -87.63,161.29 0 top  (outside the outline)
R20  191.0  [R0402]  -15.24,176.53 0 top  (outside the outline)
R21  0.1  [R0603]  -91.44,161.29 0 top  (outside the outline)
R22  0.1  [R0603]  -95.25,161.29 0 top  (outside the outline)
R23  0.1  [R0603]  -99.06,161.29 0 top  (outside the outline)
R24  240.0  [R0603]  -102.87,161.29 0 top  (outside the outline)
R25  1000.0  [R0603]  -106.68,161.29 0 top  (outside the outline)
R26  4700.0  [R0603]  -110.49,161.29 0 top  (outside the outline)
R27  4700.0  [R0603]  -114.3,161.29 0 top  (outside the outline)
R28  0.1  [R0603]  -118.11,161.29 0 top  (outside the outline)
R29  0.1  [R0603]  -121.92,161.29 0 top  (outside the outline)
R30  0.1  [R0603]  -125.73,161.29 0 top  (outside the outline)
R31  0.1  [R0603]  -129.54,161.29 0 top  (outside the outline)
R32  0.1  [R0603]  -133.35,161.29 0 top  (outside the outline)
R33  0.1  [R0603]  -15.24,166.37 0 top  (outside the outline)
R34  0.1  [R0603]  -19.05,166.37 0 top  (outside the outline)
R35  0.1  [R0603]  -22.86,166.37 0 top  (outside the outline)
R36  0.1  [R0603]  -26.67,166.37 0 top  (outside the outline)
R37  100000.0  [R0603]  -114.3,135.89 0 top  (outside the outline)
R38  100000.0  [R0603]  -119.38,135.89 0 top  (outside the outline)
R39  100000.0  [R0603]  -124.46,135.89 0 top  (outside the outline)
R40  100000.0  [R0603]  -129.54,135.89 0 top  (outside the outline)
R41  100000.0  [R0603]  -134.62,135.89 0 top  (outside the outline)
R42  100000.0  [R0603]  -15.24,140.97 0 top  (outside the outline)
R43  100000.0  [R0603]  -20.32,140.97 0 top  (outside the outline)
R44  100000.0  [R0603]  -25.4,140.97 0 top  (outside the outline)
R45  100000.0  [R0603]  -30.48,140.97 0 top  (outside the outline)
R46  100000.0  [R0603]  -35.56,140.97 0 top  (outside the outline)
R47  100000.0  [R0603]  -40.64,140.97 0 top  (outside the outline)
R48  10000.0  [R0603]  -76.2,140.97 0 top  (outside the outline)
R49  10000.0  [R0603]  -81.28,140.97 0 top  (outside the outline)
R50  10000.0  [R0603]  -86.36,140.97 0 top  (outside the outline)
R51  10000.0  [R0603]  -91.44,140.97 0 top  (outside the outline)
R52  10000.0  [R0603]  -96.52,140.97 0 top  (outside the outline)
R53  10000.0  [R0603]  -101.6,140.97 0 top  (outside the outline)
R54  10000.0  [R0603]  -106.68,140.97 0 top  (outside the outline)
R55  10000.0  [R0603]  -111.76,140.97 0 top  (outside the outline)
R56  10000.0  [R0603]  -116.84,140.97 0 top  (outside the outline)
R57  10000.0  [R0603]  -121.92,140.97 0 top  (outside the outline)
R58  47000.0  [R0603]  -127,140.97 0 top  (outside the outline)
R59  47000.0  [R0603]  -132.08,140.97 0 top  (outside the outline)
R60  47000.0  [R0603]  -15.24,146.05 0 top  (outside the outline)
R61  680.0  [R0603]  -30.48,166.37 0 top  (outside the outline)
R62  910.0  [R0603]  -34.29,166.37 0 top  (outside the outline)
R63  2200.0  [R0603]  -38.1,166.37 0 top  (outside the outline)
R64  100000.0  [R0603]  -45.72,140.97 0 top  (outside the outline)
R65  1800.0  [R0603]  -41.91,166.37 0 top  (outside the outline)
R66  1000.0  [R0603]  -45.72,166.37 0 top  (outside the outline)
R67  100000.0  [R0603]  -50.8,140.97 0 top  (outside the outline)
R68  2231.0  [R0603]  -49.53,166.37 0 top  (outside the outline)
R69  1000.0  [R0603]  -53.34,166.37 0 top  (outside the outline)
R70  100000.0  [R0603]  -55.88,140.97 0 top  (outside the outline)
R71  1600000.0  [R0603]  -104.14,135.89 0 top  (outside the outline)
R72  0.1  [R0603]  -57.15,166.37 0 top  (outside the outline)
R73  4030.2416170974  [R0603]  -83.82,135.89 0 top  (outside the outline)
R74  2700.0  [R0603]  -60.96,166.37 0 top  (outside the outline)
R75  510.0  [R0603]  -64.77,166.37 0 top  (outside the outline)
R76  130.0  [R0603]  -68.58,166.37 0 top  (outside the outline)
R77  39000.0  [R0603]  -20.32,146.05 0 top  (outside the outline)
R78  49900.0  [R0603]  -25.4,146.05 0 top  (outside the outline)
R79  20000.0  [R0603]  -30.48,146.05 0 top  (outside the outline)
R80  3155.1219512195  [R0603]  -91.44,135.89 0 top  (outside the outline)
R81  2200.0  [R0603]  -72.39,166.37 0 top  (outside the outline)
R82  100000.0  [R0603]  -60.96,140.97 0 top  (outside the outline)
R83  510.0  [R0603]  -76.2,166.37 0 top  (outside the outline)
R84  1000.0  [R0603]  -80.01,166.37 0 top  (outside the outline)
R85  20000.0  [R0603]  -35.56,146.05 0 top  (outside the outline)
R86  91000.0  [R0603]  -40.64,146.05 0 top  (outside the outline)
R87  300000.0  [R0603]  -66.04,140.97 0 top  (outside the outline)
R88  10000.0  [R0603]  -45.72,146.05 0 top  (outside the outline)
R89  75000.0  [R0603]  -50.8,146.05 0 top  (outside the outline)
R90  10000.0  [R0603]  -55.88,146.05 0 top  (outside the outline)
R91  10000.0  [R0603]  -60.96,146.05 0 top  (outside the outline)
R92  95300.0  [R0603]  -66.04,146.05 0 top  (outside the outline)
R93  95300.0  [R0603]  -71.12,146.05 0 top  (outside the outline)
R94  95300.0  [R0603]  -76.2,146.05 0 top  (outside the outline)
R95  95300.0  [R0603]  -81.28,146.05 0 top  (outside the outline)
R96  10000.0  [R0603]  -86.36,146.05 0 top  (outside the outline)
R97  10000.0  [R0603]  -91.44,146.05 0 top  (outside the outline)
R98  10000.0  [R0603]  -96.52,146.05 0 top  (outside the outline)
R99  10000.0  [R0603]  -101.6,146.05 0 top  (outside the outline)
R100  10000.0  [R0603]  -106.68,146.05 0 top  (outside the outline)
R101  40090.909090909  [R0603]  -99.06,135.89 0 top  (outside the outline)
U1  MCIMX6Q7CVT08AD  [BGA624N80P25X25_210X210X20]  -85.09,15.24 0 top  (outside the outline)
U2  nc7sz125m5x  [NC7SZ125M5X]  -97.79,123.19 0 top  (outside the outline)
U3  nc7sz125m5x  [NC7SZ125M5X]  -104.14,123.19 0 top  (outside the outline)
U4  arducam_ov2640  [ARDUCAM]  -107.95,107.95 0 top  (outside the outline)
U5  10100565  [10100565]  -71.12,25.4 0 top  (outside the outline)
U6  ER-TFT018-2  [ER-TFT018-2]  -36.83,3.81 0 top  (outside the outline)
U7  LH430WV2-SD01  [LH430WV2-SD01]  -83.82,167.64 0 top  (outside the outline)
U8  mt28ew512aba1HPC-0AAT  [LBGA-64]  -102.87,7.62 0 top  (outside the outline)
U9  WM8731CLSEFL  [QFN-28]  -30.48,118.11 0 top  (outside the outline)
U10  SJ-43515TS-SMT-TR  [SJ-43515TS-SMT-TR]  -39.37,80.01 0 top  (outside the outline)
U11  SJ-43515TS-SMT-TR  [SJ-43515TS-SMT-TR]  -67.31,80.01 0 top  (outside the outline)
U12  ABLS-24.000MHZ-B4-T  [ABLS-24.000MHZ-B4-T]  -25.4,110.49 0 top  (outside the outline)
U13  ABS07-32.768KHZ-7-T  [ABS07-32.768KHZ-7-T]  -76.2,110.49 0 top  (outside the outline)
U14  ABLS-12.288MHZ-B4-T  [ABLS-12.288MHZ-B4-T]  -45.72,110.49 0 top  (outside the outline)
U15  ASFL1-25MHZ-NCS  [ASFL1]  -67.31,101.6 0 top  (outside the outline)
U16  ASFL1-50MHZ-NCS  [ASFL1]  -83.82,101.6 0 top  (outside the outline)
U17  shpcie100  [SHPCIE100]  -114.3,74.93 0 top  (outside the outline)
U18  MIC5234YME  [SOIC-8_EP]  -115.57,109.22 0 top  (outside the outline)
U19  LP3878SDX-ADJ/NOPB  [WSON-8]  -114.3,88.9 0 top  (outside the outline)
U20  LP3878SDX-ADJ/NOPB  [WSON-8]  -30.48,100.33 0 top  (outside the outline)
U21  LT3494AEDDB#TRMPBF  [DFN-8_DDB]  -19.05,175.26 0 top  (outside the outline)
U22  IR3899MTR1PBF  [IR3899MTR1PBF]  -25.4,88.9 0 top  (outside the outline)
U23  MIC5234YME  [SOIC-8_EP]  -124.46,109.22 0 top  (outside the outline)
U24  LP3878SDX-ADJ/NOPB  [WSON-8]  -50.8,100.33 0 top  (outside the outline)
U25  LTC3601EUD#PBF  [QFN-16_EP]  -93.98,166.37 0 top  (outside the outline)
U26  LTC2928CUHF#PBF  [QFN-38_UHF]  -91.44,101.6 0 top  (outside the outline)
U27  IRF8306MTRPbF  [IRF8306MTRPBF]  -41.91,91.44 0 top  (outside the outline)
U28  IRF8306MTRPbF  [IRF8306MTRPBF]  -57.15,91.44 0 top  (outside the outline)
U29  IRF8306MTRPbF  [IRF8306MTRPBF]  -72.39,91.44 0 top  (outside the outline)
U30  IRF8306MTRPbF  [IRF8306MTRPBF]  -87.63,91.44 0 top  (outside the outline)
U31  4-1437565-2  [SW_4-1437565-2]  -100.33,77.47 0 top  (outside the outline)
U32  Q65110A2395  [LGM67K-G1J2-24-Z]  -17.78,118.11 0 top  (outside the outline)
U33  nc7sz125m5x  [NC7SZ125M5X]  -110.49,123.19 0 top  (outside the outline)
U34  nc7sz125m5x  [NC7SZ125M5X]  -116.84,123.19 0 top  (outside the outline)
U35  nc7sz125m5x  [NC7SZ125M5X]  -123.19,123.19 0 top  (outside the outline)
U36  nc7sz125m5x  [NC7SZ125M5X]  -129.54,123.19 0 top  (outside the outline)
U37  nc7sz125m5x  [NC7SZ125M5X]  -15.24,129.54 0 top  (outside the outline)
U38  nc7sz125m5x  [NC7SZ125M5X]  -21.59,129.54 0 top  (outside the outline)
U39  nc7sz125m5x  [NC7SZ125M5X]  -27.94,129.54 0 top  (outside the outline)

## Library data of the parts
C1-C154 C157-C181 I1-I3 J1 R1 R3 R5-R101 U1-U39 = circuit_tree

## Nets
CLK_CRYSTAL_U1_A7: C2.1 U1.A7 U12.1
CLK_CRYSTAL_U1_B7: C1.1 U1.B7 U12.2
CLK_CRYSTAL_U1_C9: C3.1 U1.C9 U13.2
CLK_CRYSTAL_U1_D9: C4.1 U1.D9 U13.1
CLK_CRYSTAL_U9_1: C131.1 U9.1 U14.1
CLK_CRYSTAL_U9_2: C132.1 U9.2 U14.2
CLK_U1_C7: U1.C7 U17.4
CLK_U1_D7: U1.D7 U17.5
CLK_U1_V22: U1.V22 U16.3
CLK_U4_8: U4.8 U15.3
GND: C1.2 C2.2 C3.2 C4.2 C5.2 C6.2 C7.2 C8.2 C9.2 C10.2 C11.2 C12.2 C13.2 C14.2 C15.2 C16.2 C17.2 C18.2 C19.2 C20.2 C21.2 C22.2 C23.2 C24.2 C25.2 C26.2 C27.2 C28.2 C29.2 C30.2 C31.2 C32.2 C33.2 C34.2 C35.2 C36.2 C37.2 C38.2 C39.2 C40.2 C41.2 C42.2 C43.2 C44.2 C45.2 C46.2 C47.2 C48.2 C49.2 C50.2 C51.2 C52.2 C53.2 C54.2 C55.2 C56.2 C57.2 C58.2 C59.2 C60.2 C61.2 C62.2 C63.2 C64.2 C65.2 C66.2 C67.2 C68.2 C69.2 C70.2 C71.2 C72.2 C73.2 C74.2 C75.2 C76.2 C77.2 C78.2 C79.2 C80.2 C81.2 C82.2 C83.2 C84.2 C85.2 C86.2 C87.2 C88.2 C89.2 C90.2 C91.2 C92.2 C93.2 C94.2 C95.2 C96.2 C97.2 C98.2 C99.2 C100.2 C101.2 C102.2 C103.2 C104.2 C105.2 C106.2 C107.2 C108.2 C109.2 C110.2 C111.2 C112.2 C113.2 C114.2 C115.2 C116.2 C120.2 C121.2 C122.2 C123.2 C124.2 C125.2 C126.2 C127.2 C128.2 C129.2 C130.2 C131.2 C132.2 C133.2 C134.2 C135.2 C136.2 C137.2 C138.2 C139.2 C140.2 C141.2 C142.2 C143.2 C144.2 C145.2 C146.2 C147.2 C148.2 C150.2 C151.2 C152.2 C157.2 C158.2 C159.2 C160.2 C161.2 C162.2 C163.2 C164.2 C165.2 C167.1 C167.2 C168.2 C169.2 C170.2 C171.2 C172.2 C173.2 C174.2 C175.2 C176.2 C177.2 C178.2 C179.2 C180.2 C181.2 J1.2 R3.2 R14.2 R15.2 R16.2 R17.2 R18.2 R19.2 R20.2 R21.2 R22.2 R23.2 R24.2 R25.2 R27.2 R51.2 R52.2 R58.2 R59.2 R60.2 R63.2 R66.2 R69.2 R72.1 R72.2 R74.2 R77.2 R79.2 R81.2 R84.2 R85.2 R87.2 R89.2 R92.2 R93.2 R94.2 R95.2 R96.2 R97.2 R98.2 R99.2 R100.2 U1.A4 U1.A8 U1.A13 U1.A25 U1.AA7 U1.AA10 U1.AA13 U1.AA16 U1.AA19 U1.AA22 U1.AB3 U1.AB24 U1.AD4 U1.AD7 U1.AD10 U1.AD13 U1.AD16 U1.AD19 U1.AD22 U1.AE1 U1.AE25 U1.B4 U1.C1 U1.C4 U1.C6 U1.C10 U1.D3 U1.D6 U1.D8 U1.E5 U1.E6 U1.E7 U1.F5 U1.F6 U1.F7 U1.F8 U1.G3 U1.G10 U1.G19 U1.H8 U1.H12 U1.H15 U1.H18 U1.J2 U1.J8 U1.J12 U1.J15 U1.J18 U1.K8 U1.K10 U1.K12 U1.K15 U1.K18 U1.L2 U1.L5 U1.L8 U1.L10 U1.L12 U1.L15 U1.L18 U1.M8 U1.M10 U1.M12 U1.M15 U1.M18 U1.N8 U1.N10 U1.N15 U1.N18 U1.P8 U1.P10 U1.P12 U1.P15 U1.P18 U1.R8 U1.R12 U1.R15 U1.R17 U1.T8 U1.T11 U1.T12 U1.T15 U1.T17 U1.T19 U1.U8 U1.U11 U1.U12 U1.U15 U1.U17 U1.U19 U1.V8 U1.V19 U1.W3 U1.W7 U1.W8 U1.W9 U1.W10 U1.W11 U1.W12 U1.W13 U1.W15 U1.W16 U1.W17 U1.W18 U1.W19 U1.Y5 U1.Y24 U2.3 U3.3 U4.2 U4.20 U5.6 U5.10 U5.12 U5.16 U5.17 U5.20 U5.21 U6.5 U6.13 U6.14 U6.16 U6.36 U7.1 U7.6 U7.9 U7.12 U7.15 U7.17 U7.18 U7.19 U7.24 U7.27 U8.E8 U8.H2 U8.H7 U9.4 U9.15 U9.19 U9.25 U9.26 U9.29 U10.1 U11.1 U15.2 U16.2 U17.1 U17.3 U18.7 U18.EPAD U19.3 U19.PAD U20.3 U20.PAD U21.2 U21.9 U22.4 U22.11 U22.17 U23.7 U23.EPAD U24.3 U24.PAD U25.1 U25.9 U25.17 U26.10 U26.12 U26.13 U26.24 U26.25 U26.39 U32.C U33.1 U33.3 U34.1 U34.3 U35.1 U35.3 U36.1 U36.3 U37.1 U37.3 U38.1 U38.3 U39.1 U39.3
NET_U1_A2: R19.1 U1.A2
NET_U1_A5: R22.1 U1.A5
NET_U1_AE17: R24.1 U1.AE17
NET_U1_B5: R23.1 U1.B5
NET_U1_B20: U32.A
NET_U1_C2: R12.1
NET_U1_C11: R8.1 U1.C11 U36.4
NET_U1_C14: R20.1 U1.C14
NET_U1_D4: R16.1 U1.D4
NET_U1_D19: U31.3 U31.4
NET_U1_E8: C29.1 C30.1 U1.E8
NET_U1_E11: R26.1 U1.E11
NET_U1_E12: R27.1 U1.E12
NET_U1_F9: C53.1 C54.1 U1.F9
NET_U1_G4: R17.1 U1.G4
NET_U1_G7: C47.1 C48.1 R34.1 U1.G7
NET_U1_G8: C45.1 C46.1 R33.1 U1.G8
NET_U1_G9: C19.1 C20.1 U1.G9
NET_U1_G12: C51.1 C52.1 R36.1 U1.G12
NET_U1_G13: C49.1 C50.1 R35.1 U1.G13
NET_U1_H6: R25.1 U1.H6
NET_U1_H7: C43.1 C44.1 R32.1 U1.H7
NET_U1_H10: C15.1 C16.1 C17.1 C18.1 R28.2 R29.2 R31.2 R34.2 R36.2 U1.H10 U1.J10
NET_U1_H11: C65.1 C66.1 C67.1 C68.1 C69.1 C70.1 C71.1 C72.1 C73.1 C74.1 C75.1 C76.1 C77.1 C78.1 C79.1 C80.1 C81.1 C82.1 C83.1 C84.1 C85.1 C86.1 C87.1 U1.H11 U1.H13 U1.J11 U1.J13 U1.K11 U1.L11 U1.M11 U1.N11 U1.P11 U1.R11
NET_U1_H13: U1.J13 U1.K13 U1.L13 U1.M13 U1.N13 U1.P13 U1.R13
NET_U1_H14: U1.H14
NET_U1_H17: C93.1 C94.1 C95.1 C96.1 C97.1 C98.1 C99.1 C100.1 U1.H17 U1.J17 U1.K17 U1.L17 U1.M17 U1.N17 U1.P17
NET_U1_J1: R18.1 U1.J1
NET_U1_K1: C55.1 R1.1 U1.K1
NET_U1_K2: R21.1 U1.K2
NET_U1_K7: C23.1 R28.1 U1.K7
NET_U1_K9: U1.L9 U1.M9 U1.N9 U1.P9 U1.R9 U1.T9 U1.U9
NET_U1_L7: C39.1 C40.1 R30.1 U1.L7
NET_U1_M7: C41.1 C42.1 R31.1 U1.M7
NET_U1_R10: C8.1 C9.1 C10.1 C11.1 C12.1 C13.1 C14.1 U1.N12 U1.R10 U1.T10 U1.T13 U1.T14 U1.U10 U1.U13 U1.U14
NET_U1_U14: R30.2 R32.2 R33.2 R35.2 U1.U14
NET_U1_V7: C37.1 C38.1 R29.1 U1.V7
NET_U2_1: R10.1 U2.1 U38.4
NET_U2_2: R14.1 U2.2
NET_U2_4: U1.C12 U2.4
NET_U3_1: R11.1 U3.1 U39.4
NET_U3_2: R15.1 U3.2
NET_U3_4: U1.F12 U3.4
NET_U4_19: R9.1 U4.19 U37.4
NET_U5_18: U5.18 U5.19
NET_U6_15: R5.1 U6.15 U33.4
NET_U6_38: R50.1 U6.38
NET_U6_39: R51.1 U6.39
NET_U6_40: R49.1 U6.40
NET_U7_4: R6.1 U7.4 U34.4
NET_U7_5: R13.1
NET_U7_20: R52.1 U7.20
NET_U8_B4: R56.1 U8.B4
NET_U8_B5: R7.1 U8.B5 U35.4
NET_U9_9: U9.9
NET_U9_20: C125.1 C130.1 U9.20
NET_U10_2: C118.1 R59.1 U10.2
NET_U10_5: C117.1 R58.1 U10.5
NET_U10_13: C117.2
NET_U10_14: C118.2
NET_U11_5: C119.1 C120.1 R60.1 R61.1 U11.5
NET_U11_21: R61.2
NET_U11_22: C119.2
NET_U18_4: R62.2 R63.1 U18.4
NET_U19_1: C140.1 U19.1
NET_U19_6: R65.2 R66.1 U19.6
NET_U19_8: R64.1 U19.8
NET_U20_1: C143.1 U20.1
NET_U20_6: R68.2 R69.1 U20.6
NET_U20_8: R67.1 U20.8
NET_U21_1: I1.1 U21.1
NET_U21_5: R70.1 U21.5
NET_U21_6: R71.1 U21.6
NET_U21_8: C148.1 U21.8
NET_U22_1: C153.1 R73.1 R74.1 R75.1 R76.1 U22.1 U22.8
NET_U22_2: C152.1 U22.2
NET_U22_3: C153.2 C154.1 C154.2 U22.3
NET_U22_5: R77.1 U22.5
NET_U22_10: C150.1 U22.10
NET_U22_12: C149.1 I2.1 U22.12
NET_U22_13: U22.13
NET_U22_14: C149.2 U22.14
NET_U22_15: R78.1 R79.1 U22.15
NET_U22_ATNET_3: I2.2 R73.2
NET_U22_ATNET_4: C154.2 R75.2
NET_U22_ATNET_5: R76.2
NET_U23_4: R80.2 R81.1 U23.4
NET_U24_1: C161.1 U24.1
NET_U24_6: R83.2 R84.1 U24.6
NET_U24_8: R82.1 U24.8
NET_U25_3: C166.2 I3.1 U25.3 U25.4
NET_U25_6: C166.1 U25.6
NET_U25_7: C165.1 U25.7 U25.12
NET_U25_10: R87.1 U25.10
NET_U25_11: R85.1 R86.1 U25.11
NET_U25_14: U25.14
NET_U25_ATNET_3: I3.2 R86.2
NET_U26_3: R97.1 U26.3
NET_U26_6: R92.1 U26.6
NET_U26_7: R93.1 U26.7
NET_U26_8: R94.1 U26.8
NET_U26_9: R95.1 U26.9
NET_U26_16: R96.1 R101.1 U26.16
NET_U26_18: R91.1 U26.18
NET_U26_19: R90.1 U26.19 U26.20
NET_U26_21: R88.1 R89.1 U26.21 U33.2 U34.2 U35.2 U36.2 U37.2 U38.2 U39.2
NET_U26_26: C171.1 U26.26
NET_U26_27: C170.1 U26.27
NET_U26_28: C172.1 U26.28
NET_U26_30: R100.1 U26.30
NET_U26_32: R99.1 U26.32
NET_U26_38: R98.1 U26.38
NET_U27_3: U26.2 U27.3
NET_U28_3: U26.37 U28.3
NET_U29_3: U26.31 U29.3
NET_U30_3: U26.29 U30.3
NET_U31_1: R3.1 U31.1 U31.2
PROC_AUD4_RXD: U1.W24 U9.10
PROC_AUD4_TXC: U1.U22 U9.7
PROC_AUD4_TXD: U1.T20 U9.8
PROC_AUD4_TXFS: U1.V24 U9.9 U9.11
PROC_CSI0_DAT4: U1.N1 U4.18
PROC_CSI0_DAT5: U1.P2 U4.17
PROC_CSI0_DAT6: U1.N4 U4.16
PROC_CSI0_DAT7: U1.N3 U4.15
PROC_CSI0_DAT8: U1.N6 U4.14
PROC_CSI0_DAT9: U1.N5 U4.13
PROC_CSI0_DAT10: U1.M1 U4.12
PROC_CSI0_DAT11: U1.M3 U4.11
PROC_CSI0_DAT12: U1.M2 U4.10
PROC_CSI0_DAT13: U1.L1 U4.9
PROC_CSI0_HSYNC: U1.P4 U4.6
PROC_CSI0_PIXCLK: U1.P1 U4.7
PROC_CSI0_VSYNC: U1.N2 U4.5
PROC_DSI_CLK0M: U1.H3 U7.13
PROC_DSI_CLK0P: U1.H4 U7.14
PROC_DSI_D0M: U1.G2 U7.7
PROC_DSI_D0P: U1.G1 U7.8
PROC_DSI_D1M: U1.H2 U7.10
PROC_DSI_D1P: U1.H1 U7.11
PROC_EIM_A16: U1.H25 U8.E7
PROC_EIM_A17: U1.G24 U8.B3
PROC_EIM_A18: U1.J22 U8.C4
PROC_EIM_A19: U1.G25 U8.D5
PROC_EIM_A20: U1.H22 U8.D4
PROC_EIM_A21: U1.H23 U8.C5
PROC_EIM_A22: U1.F24 U8.B8
PROC_EIM_A23: U1.J21 U8.C8
PROC_EIM_A24: U1.F25 U8.F8
PROC_EIM_CS0: R53.1 U1.H24 U8.F2
PROC_EIM_D16: U1.C25 U8.E3
PROC_EIM_D17: U1.F21 U8.H3
PROC_EIM_D18: U1.D24 U8.E4
PROC_EIM_D19: U1.G21 U8.H4
PROC_EIM_D20: U1.G20 U8.H5
PROC_EIM_D21: U1.H20 U8.E5
PROC_EIM_D22: U1.E23 U8.H6
PROC_EIM_D23: U1.D25 U8.E6
PROC_EIM_D24: U1.F22 U8.F3
PROC_EIM_D25: U1.G22 U8.G3
PROC_EIM_D26: U1.E24 U8.F4
PROC_EIM_D27: U1.E25 U8.G4
PROC_EIM_D28: U1.G23 U8.F5
PROC_EIM_D29: U1.J19 U8.G6
PROC_EIM_D30: U1.J20 U8.F6
PROC_EIM_D31: U1.H21 U8.G7
PROC_EIM_DA0: U1.L20 U8.E2
PROC_EIM_DA1: U1.J25 U8.D2
PROC_EIM_DA2: U1.L21 U8.C2
PROC_EIM_DA3: U1.K24 U8.A2
PROC_EIM_DA4: U1.L22 U8.B2
PROC_EIM_DA5: U1.L23 U8.D3
PROC_EIM_DA6: U1.K25 U8.C3
PROC_EIM_DA7: U1.L25 U8.A3
PROC_EIM_DA8: U1.L24 U8.B6
PROC_EIM_DA9: U1.M21 U8.A6
PROC_EIM_DA10: U1.M22 U8.C6
PROC_EIM_DA11: U1.M20 U8.D6
PROC_EIM_DA12: U1.M24 U8.B7
PROC_EIM_DA13: U1.M23 U8.A7
PROC_EIM_DA14: U1.N23 U8.C7
PROC_EIM_DA15: U1.N24 U8.D7
PROC_EIM_EB0: R57.1 U1.K21 U8.F7
PROC_EIM_OE: R54.1 U1.J24 U8.G2
PROC_EIM_RW: R55.1 U1.K20 U8.A5
PROC_EIM_WAIT: U1.M25 U8.A4
PROC_LCD_CS: R48.1 U1.N20 U6.9
PROC_LCD_DATA00: U1.P24 U6.17
PROC_LCD_DATA01: U1.P22 U6.18
PROC_LCD_DATA02: U1.P23 U6.19
PROC_LCD_DATA03: U1.P21 U6.20
PROC_LCD_DATA04: U1.P20 U6.21
PROC_LCD_DATA05: U1.R25 U6.22
PROC_LCD_DATA06: U1.R23 U6.23
PROC_LCD_DATA07: U1.R24 U6.24
PROC_LCD_DATA08: U1.R22 U6.25
PROC_LCD_DATA09: U1.T25 U6.26
PROC_LCD_DATA10: U1.R21 U6.27
PROC_LCD_DATA11: U1.T23 U6.28
PROC_LCD_DATA12: U1.T24 U6.29
PROC_LCD_DATA13: U1.R20 U6.30
PROC_LCD_DATA14: U1.U25 U6.31
PROC_LCD_DATA15: U1.T22 U6.32
PROC_LCD_RD_E: U1.N21 U6.11
PROC_LCD_RS: U1.N25 U6.10
PROC_LCD_WR_RWN: U1.N19 U6.12
PROC_SD1_CD_B: R38.1 U5.2
PROC_SD1_CLK: R37.1 U5.8
PROC_SD1_DATA0: R40.1 U5.4
PROC_SD1_DATA1: R41.1 U5.3
PROC_SD1_DATA2: R42.1 U5.15
PROC_SD1_DATA3: R43.1 U5.14
PROC_SD1_DATA4: R44.1 U5.13
PROC_SD1_DATA5: R45.1 U5.11
PROC_SD1_DATA6: R46.1 U5.7
PROC_SD1_DATA7: R47.1 U5.5
PROC_SD1_WP: R39.1 U5.1
VCC_5V6: C168.1 C169.1 C173.1 C174.1 J1.1 R88.2 R90.2 R91.2 R101.2 U26.11 U26.22 U27.1 U27.2 U27.6 U27.7 U28.1 U28.2 U28.6 U28.7 U29.1 U29.2 U29.6 U29.7 U30.1 U30.2 U30.6 U30.7
VCC_S1_5V6: C136.1 C137.1 C141.1 C144.1 C146.1 I1.2 R64.2 R67.2 R70.2 U18.5 U18.8 U19.4 U20.4 U21.3 U21.4 U27.4 U27.5
VCC_S2_5V6: C151.1 R78.2 U22.9 U28.4 U28.5
VCC_S3_5V6: C157.1 C158.1 U23.5 U23.8 U29.4 U29.5
VCC_S4_5V6: C162.1 C164.1 R82.2 U24.4 U25.15 U25.16 U30.4 U30.5
VCC_TIER1_1V5: C138.1 C139.1 R62.1 U7.29 U18.1
VCC_TIER1_2V8: C112.1 C113.1 C114.1 C142.1 R65.1 U7.16 U7.21 U7.22 U7.23 U19.5
VCC_TIER1_3V3: C7.1 C105.1 C106.1 C110.1 C115.1 C116.1 C133.1 C134.1 C135.1 C145.1 C175.1 C176.1 C177.1 C178.1 C179.1 C180.1 C181.1 R6.2 R7.2 R8.2 R10.2 R11.2 R13.2 R26.2 R37.2 R38.2 R39.2 R40.2 R41.2 R42.2 R43.2 R44.2 R45.2 R46.2 R47.2 R53.2 R54.2 R55.2 R56.2 R57.2 R68.1 U1.G11 U2.5 U3.5 U5.9 U7.2 U8.D8 U8.F1 U8.G5 U15.4 U16.4 U17.6 U20.5 U33.5 U34.5 U35.5 U36.5 U37.5 U38.5 U39.5
VCC_TIER1_12V0: C111.1 C147.1 R71.2 U7.30 U21.7
VCC_TIER2_1V275: C88.1 C89.1 C90.1 C91.1 C92.1 C101.1 C102.1 C103.1 I2.2 R73.2 U1.H14 U1.H16 U1.J14 U1.J16 U1.K9 U1.K14 U1.K16 U1.L9 U1.L14 U1.L16 U1.M14 U1.M16 U1.N14 U1.N16 U1.P14 U1.P16 U1.R14 U1.R16 U1.T16 U1.U16
VCC_TIER3_2V8: C5.1 C6.1 C159.1 C160.1 R80.1 U1.H9 U1.J9 U23.1
VCC_TIER4_1V5: C31.1 C56.1 C57.1 C58.1 C59.1 C60.1 C61.1 C62.1 C63.1 C64.1 C163.1 R83.1 U1.G18 U1.R18 U1.T18 U1.U18 U1.V9 U1.V10 U1.V11 U1.V12 U1.V13 U1.V14 U1.V15 U1.V16 U1.V17 U1.V18 U24.5
VCC_TIER4_3V3: C21.1 C22.1 C24.1 C25.1 C26.1 C27.1 C28.1 C32.1 C33.1 C34.1 C35.1 C36.1 C104.1 C107.1 C108.1 C109.1 C121.1 C122.1 C123.1 C124.1 C126.1 C127.1 C128.1 C129.1 C167.2 I3.2 R1.2 R5.2 R9.2 R12.2 R48.2 R49.2 R50.2 R86.2 U1.G14 U1.G15 U1.G16 U1.G17 U1.J7 U1.K19 U1.L19 U1.M19 U1.N7 U1.P7 U1.P19 U1.R19 U4.1 U6.6 U6.7 U6.35 U9.3 U9.5 U9.12 U9.18 U25.8

## Tracks (layer width: path | path; a pad name or v marks a point on that pad's centre or on a via)
CLK_CRYSTAL_U1_A7  (2 unrouted)
CLK_CRYSTAL_U1_B7  (2 unrouted)
CLK_CRYSTAL_U1_C9  (2 unrouted)
CLK_CRYSTAL_U1_D9  (2 unrouted)
CLK_CRYSTAL_U9_1  (2 unrouted)
CLK_CRYSTAL_U9_2  (2 unrouted)
CLK_U1_C7  (1 unrouted)
CLK_U1_D7  (1 unrouted)
CLK_U1_V22  (1 unrouted)
CLK_U4_8  (1 unrouted)
GND  (401 unrouted)
NET_U1_A2  (1 unrouted)
NET_U1_A5  (1 unrouted)
NET_U1_AE17  (1 unrouted)
NET_U1_B5  (1 unrouted)
NET_U1_C11  (2 unrouted)
NET_U1_C14  (1 unrouted)
NET_U1_D4  (1 unrouted)
NET_U1_D19  (1 unrouted)
NET_U1_E8  (2 unrouted)
NET_U1_E11  (1 unrouted)
NET_U1_E12  (1 unrouted)
NET_U1_F9  (2 unrouted)
NET_U1_G4  (1 unrouted)
NET_U1_G7  (3 unrouted)
NET_U1_G8  (3 unrouted)
NET_U1_G9  (2 unrouted)
NET_U1_G12  (3 unrouted)
NET_U1_G13  (3 unrouted)
NET_U1_H6  (1 unrouted)
NET_U1_H7  (3 unrouted)
NET_U1_H10  (10 unrouted)
NET_U1_H11  (32 unrouted)
NET_U1_H13  (6 unrouted)
NET_U1_H17  (14 unrouted)
NET_U1_J1  (1 unrouted)
NET_U1_K1  (2 unrouted)
NET_U1_K2  (1 unrouted)
NET_U1_K7  (2 unrouted)
NET_U1_K9  (6 unrouted)
NET_U1_L7  (3 unrouted)
NET_U1_M7  (3 unrouted)
NET_U1_R10  (14 unrouted)
NET_U1_U14  (4 unrouted)
NET_U1_V7  (3 unrouted)
NET_U2_1  (2 unrouted)
NET_U2_2  (1 unrouted)
NET_U2_4  (1 unrouted)
NET_U3_1  (2 unrouted)
NET_U3_2  (1 unrouted)
NET_U3_4  (1 unrouted)
NET_U4_19  (2 unrouted)
NET_U5_18  (1 unrouted)
NET_U6_15  (2 unrouted)
NET_U6_38  (1 unrouted)
NET_U6_39  (1 unrouted)
NET_U6_40  (1 unrouted)
NET_U7_4  (2 unrouted)
NET_U7_20  (1 unrouted)
NET_U8_B4  (1 unrouted)
NET_U8_B5  (2 unrouted)
NET_U9_20  (2 unrouted)
NET_U10_2  (2 unrouted)
NET_U10_5  (2 unrouted)
NET_U11_5  (4 unrouted)
NET_U18_4  (2 unrouted)
NET_U19_1  (1 unrouted)
NET_U19_6  (2 unrouted)
NET_U19_8  (1 unrouted)
NET_U20_1  (1 unrouted)
NET_U20_6  (2 unrouted)
NET_U20_8  (1 unrouted)
NET_U21_1  (1 unrouted)
NET_U21_5  (1 unrouted)
NET_U21_6  (1 unrouted)
NET_U21_8  (1 unrouted)
NET_U22_1  (6 unrouted)
NET_U22_2  (1 unrouted)
NET_U22_3  (3 unrouted)
NET_U22_5  (1 unrouted)
NET_U22_10  (1 unrouted)
NET_U22_12  (2 unrouted)
NET_U22_14  (1 unrouted)
NET_U22_15  (2 unrouted)
NET_U22_ATNET_3  (1 unrouted)
NET_U22_ATNET_4  (1 unrouted)
NET_U23_4  (2 unrouted)
NET_U24_1  (1 unrouted)
NET_U24_6  (2 unrouted)
NET_U24_8  (1 unrouted)
NET_U25_3  (3 unrouted)
NET_U25_6  (1 unrouted)
NET_U25_7  (2 unrouted)
NET_U25_10  (1 unrouted)
NET_U25_11  (2 unrouted)
NET_U25_ATNET_3  (1 unrouted)
NET_U26_3  (1 unrouted)
NET_U26_6  (1 unrouted)
NET_U26_7  (1 unrouted)
NET_U26_8  (1 unrouted)
NET_U26_9  (1 unrouted)
NET_U26_16  (2 unrouted)
NET_U26_18  (1 unrouted)
NET_U26_19  (2 unrouted)
NET_U26_21  (9 unrouted)
NET_U26_26  (1 unrouted)
NET_U26_27  (1 unrouted)
NET_U26_28  (1 unrouted)
NET_U26_30  (1 unrouted)
NET_U26_32  (1 unrouted)
NET_U26_38  (1 unrouted)
NET_U27_3  (1 unrouted)
NET_U28_3  (1 unrouted)
NET_U29_3  (1 unrouted)
NET_U30_3  (1 unrouted)
NET_U31_1  (2 unrouted)
PROC_AUD4_RXD  (1 unrouted)
PROC_AUD4_TXC  (1 unrouted)
PROC_AUD4_TXD  (1 unrouted)
PROC_AUD4_TXFS  (2 unrouted)
PROC_CSI0_DAT4  (1 unrouted)
PROC_CSI0_DAT5  (1 unrouted)
PROC_CSI0_DAT6  (1 unrouted)
PROC_CSI0_DAT7  (1 unrouted)
PROC_CSI0_DAT8  (1 unrouted)
PROC_CSI0_DAT9  (1 unrouted)
PROC_CSI0_DAT10  (1 unrouted)
PROC_CSI0_DAT11  (1 unrouted)
PROC_CSI0_DAT12  (1 unrouted)
PROC_CSI0_DAT13  (1 unrouted)
PROC_CSI0_HSYNC  (1 unrouted)
PROC_CSI0_PIXCLK  (1 unrouted)
PROC_CSI0_VSYNC  (1 unrouted)
PROC_DSI_CLK0M  (1 unrouted)
PROC_DSI_CLK0P  (1 unrouted)
PROC_DSI_D0M  (1 unrouted)
PROC_DSI_D0P  (1 unrouted)
PROC_DSI_D1M  (1 unrouted)
PROC_DSI_D1P  (1 unrouted)
PROC_EIM_A16  (1 unrouted)
PROC_EIM_A17  (1 unrouted)
PROC_EIM_A18  (1 unrouted)
PROC_EIM_A19  (1 unrouted)
PROC_EIM_A20  (1 unrouted)
PROC_EIM_A21  (1 unrouted)
PROC_EIM_A22  (1 unrouted)
PROC_EIM_A23  (1 unrouted)
PROC_EIM_A24  (1 unrouted)
PROC_EIM_CS0  (2 unrouted)
PROC_EIM_D16  (1 unrouted)
PROC_EIM_D17  (1 unrouted)
PROC_EIM_D18  (1 unrouted)
PROC_EIM_D19  (1 unrouted)
PROC_EIM_D20  (1 unrouted)
PROC_EIM_D21  (1 unrouted)
PROC_EIM_D22  (1 unrouted)
PROC_EIM_D23  (1 unrouted)
PROC_EIM_D24  (1 unrouted)
PROC_EIM_D25  (1 unrouted)
PROC_EIM_D26  (1 unrouted)
PROC_EIM_D27  (1 unrouted)
PROC_EIM_D28  (1 unrouted)
PROC_EIM_D29  (1 unrouted)
PROC_EIM_D30  (1 unrouted)
PROC_EIM_D31  (1 unrouted)
PROC_EIM_DA0  (1 unrouted)
PROC_EIM_DA1  (1 unrouted)
PROC_EIM_DA2  (1 unrouted)
PROC_EIM_DA3  (1 unrouted)
PROC_EIM_DA4  (1 unrouted)
PROC_EIM_DA5  (1 unrouted)
PROC_EIM_DA6  (1 unrouted)
PROC_EIM_DA7  (1 unrouted)
PROC_EIM_DA8  (1 unrouted)
PROC_EIM_DA9  (1 unrouted)
PROC_EIM_DA10  (1 unrouted)
PROC_EIM_DA11  (1 unrouted)
PROC_EIM_DA12  (1 unrouted)
PROC_EIM_DA13  (1 unrouted)
PROC_EIM_DA14  (1 unrouted)
PROC_EIM_DA15  (1 unrouted)
PROC_EIM_EB0  (2 unrouted)
PROC_EIM_OE  (2 unrouted)
PROC_EIM_RW  (2 unrouted)
PROC_EIM_WAIT  (1 unrouted)
PROC_LCD_CS  (2 unrouted)
PROC_LCD_DATA00  (1 unrouted)
PROC_LCD_DATA01  (1 unrouted)
PROC_LCD_DATA02  (1 unrouted)
PROC_LCD_DATA03  (1 unrouted)
PROC_LCD_DATA04  (1 unrouted)
PROC_LCD_DATA05  (1 unrouted)
PROC_LCD_DATA06  (1 unrouted)
PROC_LCD_DATA07  (1 unrouted)
PROC_LCD_DATA08  (1 unrouted)
PROC_LCD_DATA09  (1 unrouted)
PROC_LCD_DATA10  (1 unrouted)
PROC_LCD_DATA11  (1 unrouted)
PROC_LCD_DATA12  (1 unrouted)
PROC_LCD_DATA13  (1 unrouted)
PROC_LCD_DATA14  (1 unrouted)
PROC_LCD_DATA15  (1 unrouted)
PROC_LCD_RD_E  (1 unrouted)
PROC_LCD_RS  (1 unrouted)
PROC_LCD_WR_RWN  (1 unrouted)
PROC_SD1_CD_B  (1 unrouted)
PROC_SD1_CLK  (1 unrouted)
PROC_SD1_DATA0  (1 unrouted)
PROC_SD1_DATA1  (1 unrouted)
PROC_SD1_DATA2  (1 unrouted)
PROC_SD1_DATA3  (1 unrouted)
PROC_SD1_DATA4  (1 unrouted)
PROC_SD1_DATA5  (1 unrouted)
PROC_SD1_DATA6  (1 unrouted)
PROC_SD1_DATA7  (1 unrouted)
PROC_SD1_WP  (1 unrouted)
VCC_5V6  (26 unrouted)
VCC_S1_5V6  (16 unrouted)
VCC_S2_5V6  (4 unrouted)
VCC_S3_5V6  (5 unrouted)
VCC_S4_5V6  (7 unrouted)
VCC_TIER1_1V5  (4 unrouted)
VCC_TIER1_2V8  (9 unrouted)
VCC_TIER1_3V3  (59 unrouted)
VCC_TIER1_12V0  (4 unrouted)
VCC_TIER2_1V275  (29 unrouted)
VCC_TIER3_2V8  (7 unrouted)
VCC_TIER4_1V5  (26 unrouted)
VCC_TIER4_3V3  (54 unrouted)